# Altium PCB DFB (ADAPTER).PcbDoc
Units mm, origin at the board's own origin, x right, y up, seen from the top; angles counter-clockwise.
Board outline 45 x 65.35 mm, 2 copper layers (Top Layer, Bottom Layer); 3 components, 51 nets, 42 pads, 0 vias.
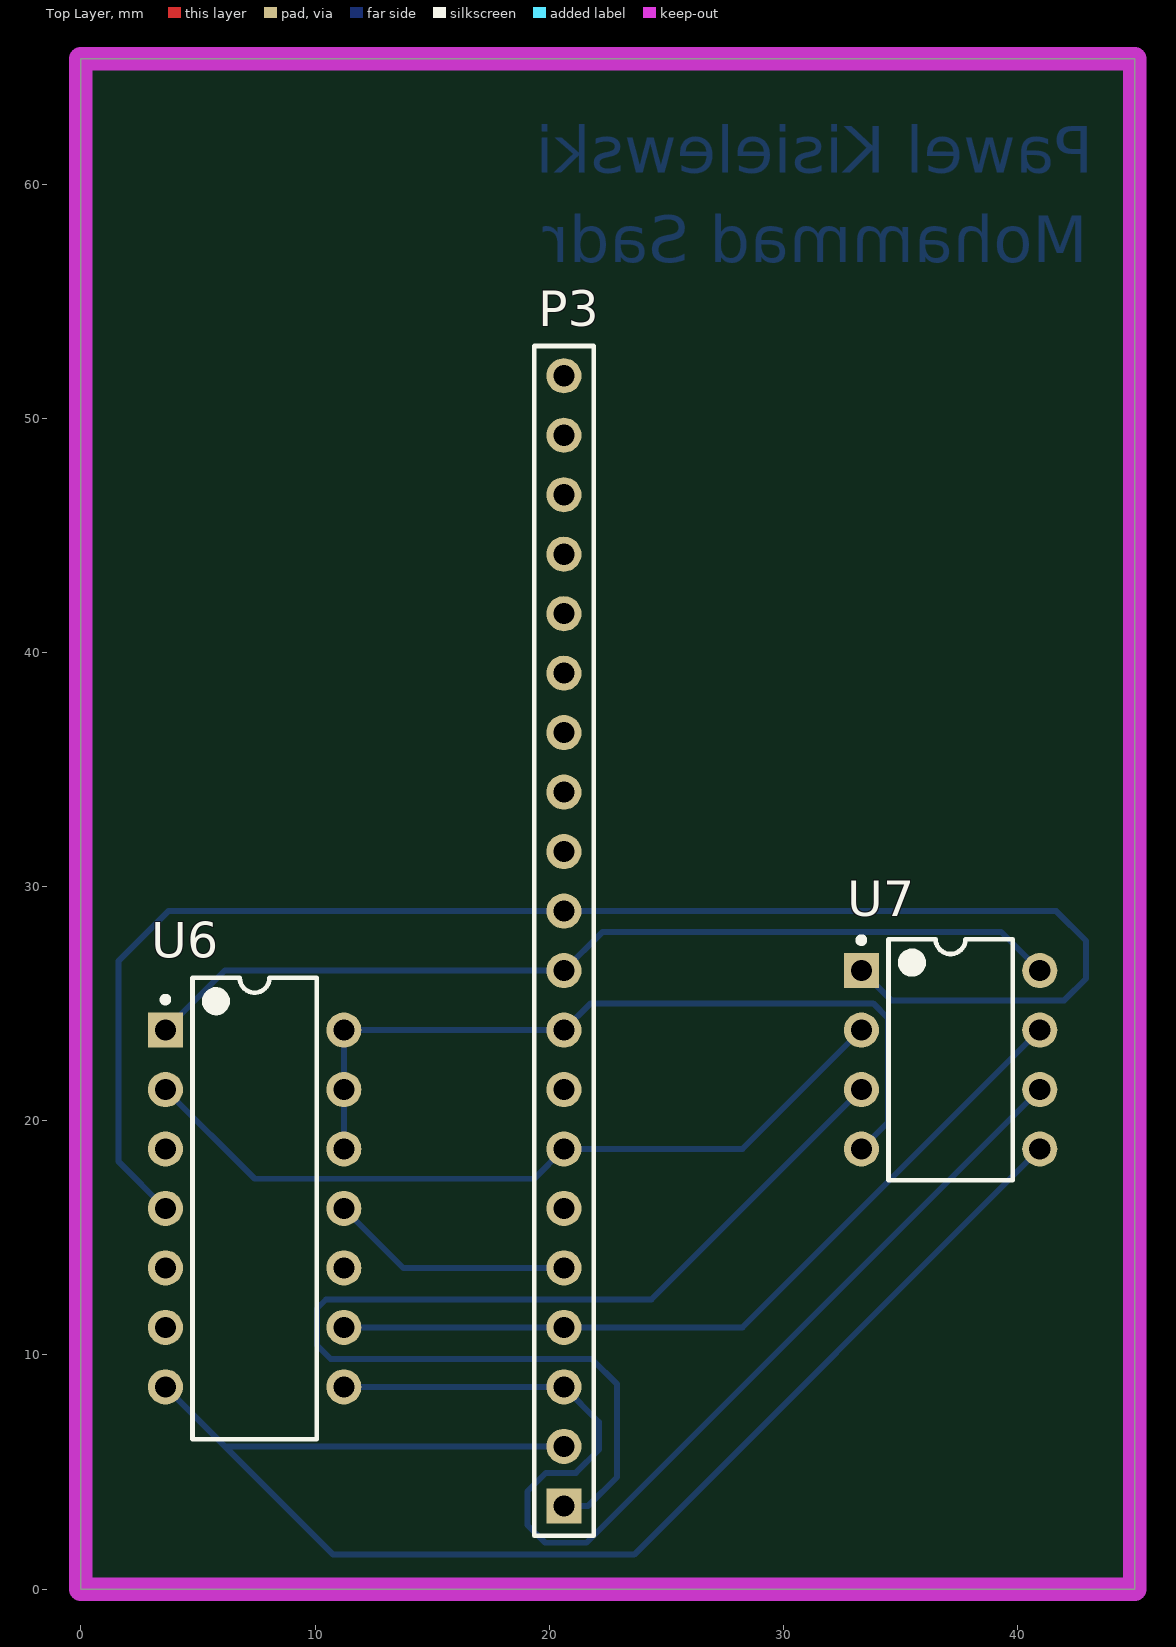
[diagram p0: Top Layer view]
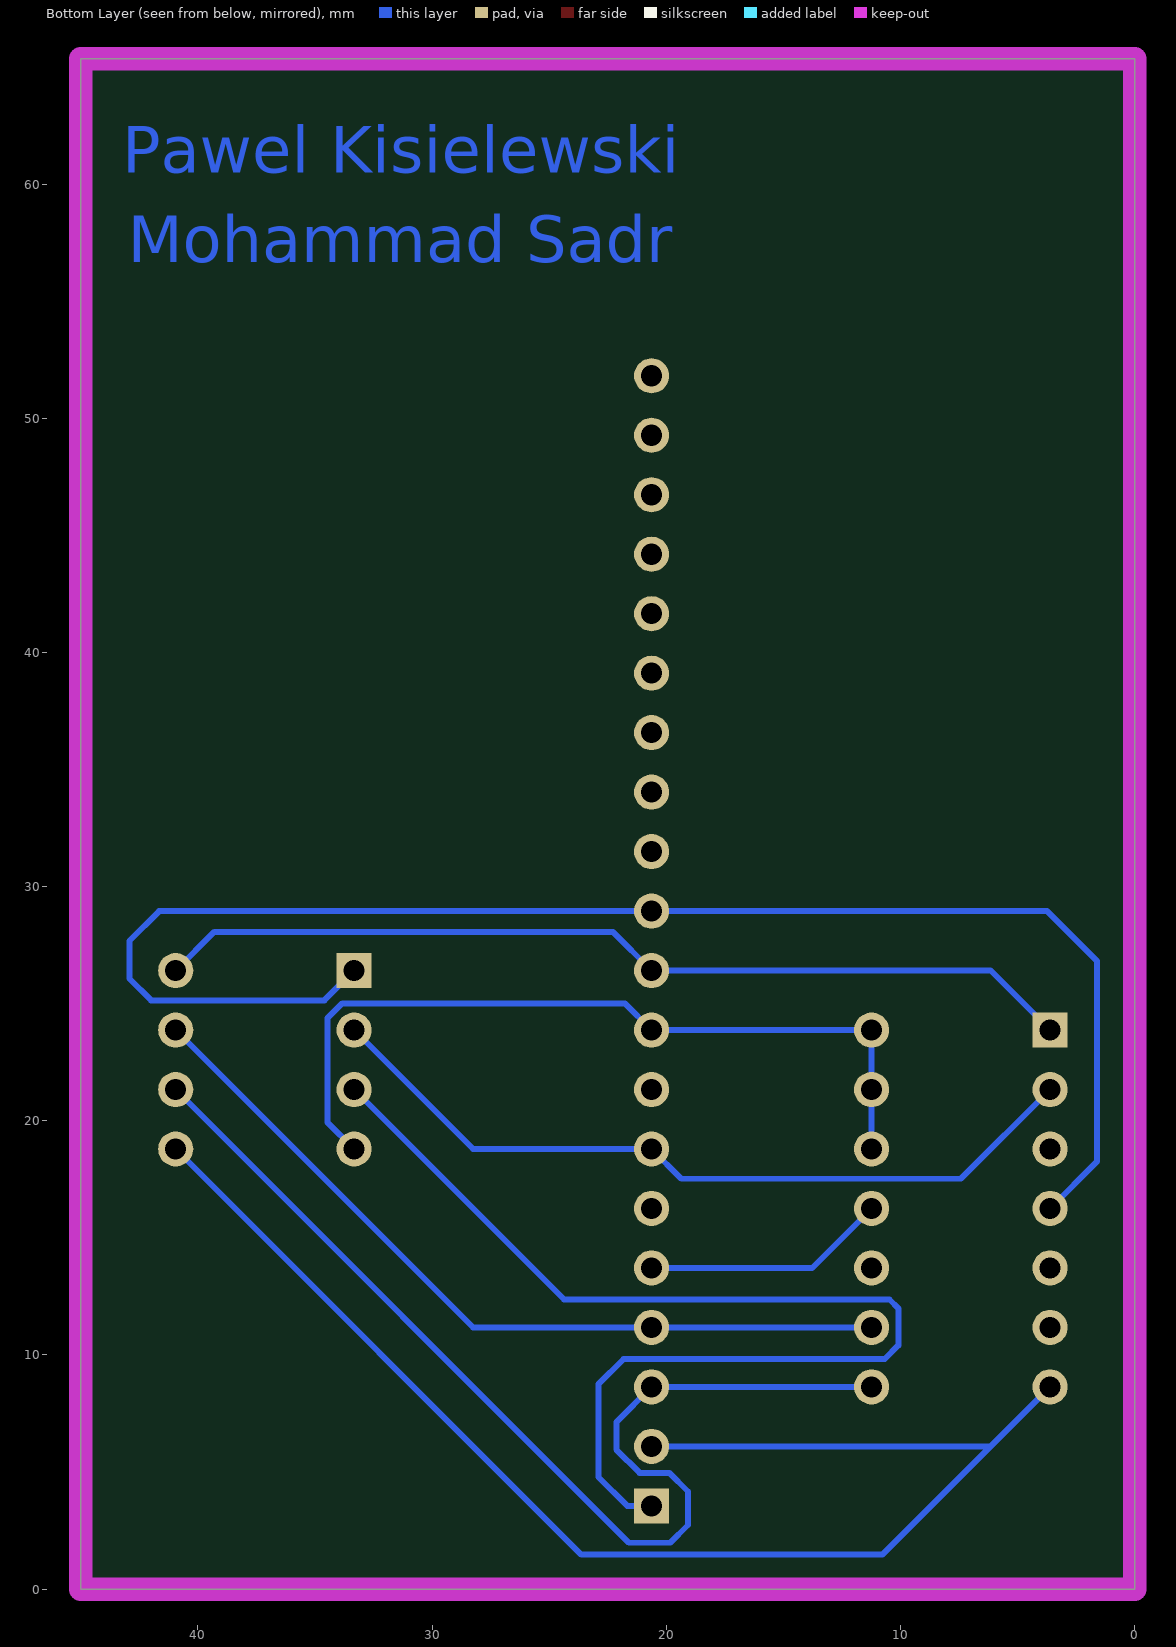
[diagram p1: Bottom Layer view, seen from below]

## Layer stack, top to bottom
Top Solder: solder mask 0.0102, Solder Resist, Dk 3.5
Top Layer: signal copper 0.0356
Dielectric 1: dielectric 0.32, FR-4, Dk 4.8
Bottom Layer: signal copper 0.0356
Bottom Solder: solder mask 0.0102, Solder Resist, Dk 3.5

## Board outline
0,0 0,65.35 45,65.35 45,0

## Design rules (kind name [scope] priority, off if disabled: settings)
Clearance [All] p1: gap=0.254 ignorepadtopadclearanceinfootprint=FALSE
PolygonConnect [All] p1: connectstyle=Relief reliefconductorwidth=0.254 reliefentries=4 polygonreliefangle="90 Angle" airgapwidth=0.254
RoutingVias [All] p1: holewidth=0.711 width=1.27 viastyle="Through Hole" minholewidth=0.711 minwidth=1.27 maxholewidth=0.711 maxwidth=1.27
SolderMaskExpansion [All] p1: expansion=0.102
Width [All] p1: maxlimit=0.279 minlimit=0.254 preferedwidth=0.254 minimp=50.000000 maximp=50.000000 favimp=50.000000
30 further rules are at their usual default settings.

## Classes and differential pairs
component class DFB: U2

## Components (designator, comment, footprint, x,y, rotation, side; value= is the part's Value field where it differs from the comment)
P3 "Header 20" HDR1X20 20.628,3.556 r90 top
U6 "ATtiny24A-PU" 14P3 7.42,16.256 r0 top
U7 "ATtiny13A-PU" 8P3 37.14,22.606 r0 top

## Footprints (in the part's own frame and the unit in brackets; to place one, negate y for a bottom-side part, rotate by r counter-clockwise, add the part's x,y. Pads: shape width x height; smd on the part's side, far side on the other; paste and mask are expansions set on the pad)
8P3 [mm] "DIP, 8-Leads, Row Spacing 7.62mm, Pitch 2.54mm, Body 9.59x6.61mm"
  rect 1.5x1.5 hole 0.9: 1(-3.81,3.81)
  round 1.5 hole 0.9: 2(-3.81,1.27) 3(-3.81,-1.27) 4(-3.81,-3.81) 5(3.81,-3.81) 6(3.81,-1.27) 7(3.81,1.27) 8(3.81,3.81)
  silkscreen extent -3.93,-5.15 2.65,5.23, body extent -3.6,-5.15 3.6,5.15, height 5.34
14P3 [mm] "DIP, 14-Leads, Row Spacing 7.62mm, Pitch 2.54mm, Body 19.2x6.6mm"
  rect 1.5x1.5 hole 0.9: 1(-3.81,7.62)
  round 1.5 hole 0.9: 2(-3.81,5.08) 3(-3.81,2.54) 4(-3.81,0) 5(-3.81,-2.54) 6(-3.81,-5.08) 7(-3.81,-7.62) 8(3.81,-7.62) 9(3.81,-5.08) 10(3.81,-2.54) 11(3.81,0) 12(3.81,2.54) 13(3.81,5.08) 14(3.81,7.62)
  silkscreen extent -3.93,-9.85 2.65,9.85, body extent -3.55,-9.85 3.55,9.85, height 5.34
HDR1X20 [mm] "Connector; Header; 20 Position"
  rect 1.5x1.5 hole 0.9: 1(0,0)
  round 1.5 hole 0.9: 2(2.54,0) 3(5.08,0) 4(7.62,0) 5(10.16,0) 6(12.7,0) 7(15.24,0) 8(17.78,0) 9(20.32,0) 10(22.86,0) 11(25.4,0) 12(27.94,0) 13(30.48,0) 14(33.02,0) 15(35.56,0) 16(38.1,0) 17(40.64,0) 18(43.18,0) 19(45.72,0) 20(48.26,0)
  silkscreen extent -1.27,-1.27 49.53,1.27

## Part data
P3: "Header, 20-Pin", LatestRevisionDate=17-Jul-2002, LatestRevisionNote="Re-released for DXP Platform.", Publisher="Altium Limited"
U6: "8-bit AVR Microcontroller, 1.8-5.5V, 2KB Flash, 128 Bytes EEPROM, 128 Bytes SRAM, 14-pin PDIP, Industrial Grade (-40°C to 85°C), Pb-Free", Supplier Part Number 1=ATTINY24A-PU-ND, Code_JEDEC=MS-001-AA, ComponentLink1Description="Manufacturer Link", ComponentLink1URL=http://www.atmel.com/products/avr/default.asp?, ComponentLink2Description="ATtiny24A/44A Datasheet", ComponentLink2URL=http://www.atmel.com/dyn/resources/prod_documents/doc8183.pdf, ComponentLink3Description="ATtiny24A/44A Summary", ComponentLink3URL=http://www.atmel.com/dyn/resources/prod_documents/8183S.pdf, ComponentLink4Description="Atmel.com Home", ComponentLink4URL=http://www.atmel.com, DatasheetVersion="revA, Dec-2008", PackageDescription="14-Lead Plastic Dual In-Line, 300 mil/7.62 mm Wide Body (PDIP)", PackageReference=14P3, PackageVersion="revA, Nov-2005", Published=1-Apr-2010, Publisher="Altium Limited", Supplier 1=Digi-Key, Supplier 2=Farnell, Supplier 3=Mouser, Supplier Part Number 2=1699394, Supplier Part Number 3=556-ATTINY24A-PU
U7: "8-bit AVR Microcontroller, 1.8-5.5V, 1KB Flash, 64 Bytes EEPROM, 64 Bytes SRAM, 8-pin PDIP, Industrial Grade (-40°C to 85°C), Pb-Free", Supplier Part Number 1=ATTINY13A-PU-ND, Code_JEDEC=MS-001-BA, ComponentLink1Description="Manufacturer Link", ComponentLink1URL=http://www.atmel.com/products/avr/default.asp?, ComponentLink2Description="ATtiny13A Datasheet", ComponentLink2URL=http://www.atmel.com/dyn/resources/prod_documents/doc8126.pdf, ComponentLink3Description="ATtiny13A Summary", ComponentLink3URL=http://www.atmel.com/dyn/resources/prod_documents/8126S.pdf, ComponentLink4Description="Atmel.com Home", ComponentLink4URL=http://www.atmel.com, DatasheetVersion="revD, Nov-2009", PackageDescription="8-Lead, 0.300\" Wide Body, Plastic Dual In-Line Package (PDIP)", PackageReference=8P3, PackageVersion="revB, Jan-2002", Published=1-Apr-2010, Publisher="Altium Limited", Supplier 1=Digi-Key, Supplier 2=Farnell, Supplier 3=Mouser, Supplier Part Number 2=1704566, Supplier Part Number 3=556-ATTINY13A-PU

## Nets (pads, with @x,y where several pads share a name; then routed paths per layer and width w, separated by ;. In a path a pad name is that pad's centre, name@x,y a point inside that pad or via, vN(x,y) a via of type N, cw(c..) or ccw(c..) an arc to the next point about the centre after c; other vN are vias at no path point)
5VCC: P3.10 U6.1 U7.8 | length 39.8
  Bottom Layer w0.254: U6.1 6.15,26.416 P3.10 22.282,28.07 39.296,28.07 U7.8
12VCC: P3.11 U6.4 U7.1 | length 66.3
  Bottom Layer w0.254: U6.4 1.6,18.266 1.6,26.819 3.737,28.956 P3.11 41.654,28.956 42.93,27.68 42.93,26.08 41.996,25.146 34.6,25.146 U7.1
+5: 
+12: 
BS1: P3.4 U6.9 U7.7 | length 35
  Bottom Layer w0.254: U6.9 P3.4 28.25,11.176 U7.7
BS2: P3.20
DATA0: P3.19
DATA1: P3.18
DATA2: P3.17
DATA3: P3.16
DATA4: P3.15
DATA5: P3.14
DATA6: P3.13
DATA7: P3.12
ERASE: 
GND: P3.9 U6.12 U6.13 U6.14 U7.4 | length 35.1
  Bottom Layer w0.254: U6.12 U6.13 U6.14 P3.9 21.771,25.019 33.836,25.019 34.471,24.384 34.471,19.937 U7.4
L1: 
L2: 
NetD1_2: 
NetQ1_2: 
NetQ1_3: 
NetQ2_2: 
NetQ2_3: 
NetQ3_2: 
NetR5_2: 
NetR6_1: 
NetR9_2: 
NetR10_1: 
NetR11_1: 
NetR12_2: 
NetR13_1: 
NetR15_1: 
NetR17_1: 
NetR18_1: 
NetR19_2: 
NetR20_1: 
NetR21_1: 
NetR22_1: 
NetR23_1: 
NetR24_1: 
NetR25_1: 
NetR26_1: 
OE: P3.6
PAG: P3.1 U7.3 | length 48.9
  Bottom Layer w0.254: P3.1 21.666,3.556 22.9,4.79 22.9,8.75 21.82,9.83 10.671,9.83 10.087,10.414 10.087,11.989 10.468,12.37 24.364,12.37 U7.3
RDY: P3.7 U6.2 U7.2 | length 33.9
  Bottom Layer w0.254: U6.2 7.42,17.526 19.358,17.526 P3.7 28.25,18.796 U7.2
RX: 
TX: 
WR: P3.5 U6.11 | length 10.5
  Bottom Layer w0.254: U6.11 13.77,13.716 P3.5
XA0: P3.3 U6.8 U7.6 | length 48.1
  Bottom Layer w0.254: U6.8 P3.3 22.13,7.134 22.13,5.959 21.136,4.965 19.866,4.965 19.07,4.169 19.07,2.74 19.829,1.981 21.595,1.981 U7.6
XA1: P3.2 U6.7 U7.5 | length 62
  Bottom Layer w0.254: U6.7 6.15,6.096 ; P3.2 6.15,6.096 ; U7.5 23.627,1.473 10.773,1.473 6.15,6.096
XTAL1: P3.8
pads on no net: U6.3 U6.5 U6.6 U6.10

## Keep-outs
Keep-Out Layer:
  the board outline again, w1

## Other copper
Bottom Layer:
  text "Pawel Kisielewski" at 43.24,60.49 h2
  text "Mohammad Sadr" at 42.99,56.66 h2